# EAGLE board VF_24Euro_PANEL (EAGLE 9.6.2)
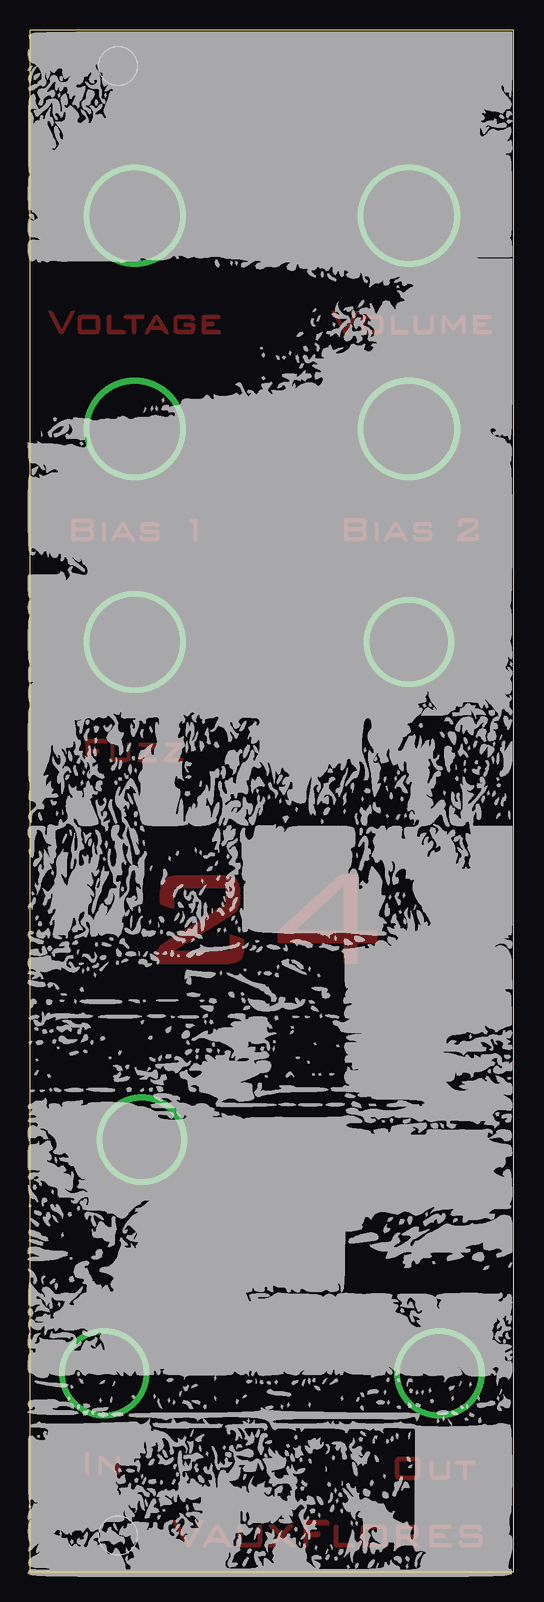
[diagram p0: board, top side]

Size 40.3 x 128.5 mm. Coordinates in mm from the lower left corner, seen from the top.
Copper layers (1*16): Top 0.035mm / dielectric 1.5mm / Bottom 0.035mm
Design rules "default": minimum track width 6mil, minimum drill 0.35mm, track to track 6mil, track to pad 6mil, pad to pad 6mil, via to via 6mil, smd to smd 6mil, copper to edge 40mil, drill to drill 6mil, minimum pad ring 10mil, minimum via ring 8mil, stop-mask expansion 4mil, vias tented up to drill 0mil, thermal gap 10mil
Net classes: 1 power: width 0.61 mm

## Footprints (pad centres in the part's own frame; a part is rotated, then mirrored left to right if it is on the bottom)
EURO_PANEL_8HP = hole 3.2: 7.5,3; 7.5,125.5

## Placement (x,y rotation side)
U$3  [EURO_PANEL_8HP]  -0.17,0 0 top

## Library data of the parts
U$3 = eurohelper

## Tracks (layer width: path | path; a pad name or v marks a point on that pad's centre or on a via)
GND
  pour Top (rank 3): 3.71,105.02 3.51,105.02 3.36,104.93 2.73,103.68 2.64,103.51 1.89,104.93 1.74,105.02 1.54,105.02 1.59,104.87 2.46,103.29 2.6,103.2 2.78,103.24
  pour Top (rank 3): 5.8,103.73 5.8,104.33 5.78,104.53 5.65,104.67 5.45,104.69 4.46,104.69 4.26,104.69 4.07,104.63 3.99,104.45 3.99,104.25 3.99,103.65 3.99,103.45 4.06,103.27 4.24,103.21 4.32,103.44 4.27,103.57 4.27,104.36 4.36,104.47 5.36,104.47 5.52,104.44 5.52,103.44 5.52,103.42 4.34,103.42 4.26,103.2 4.45,103.2 5.44,103.2 5.64,103.22 5.78,103.35 5.8,103.55
  pour Top (rank 3): 7.9,103.2 7.9,103.4 7.72,103.42 6.91,103.42 6.74,103.45 6.74,104.67 6.56,104.69 6.46,104.59 6.46,103.38 6.48,103.2
  pour Top (rank 3): 9.51,104.47 9.51,104.67 9.34,104.69 7.94,104.69 7.82,104.62 7.87,104.47 8.47,104.47 8.52,104.33 8.52,103.33 8.59,103.2 8.79,103.2 8.8,103.39 8.8,104.38 8.91,104.47
  pour Top (rank 3): 11.49,103.34 10.77,104.54 10.66,104.69 10.46,104.69 10.35,104.55 9.65,103.35 9.59,103.2 9.79,103.2 9.91,103.33 10.01,103.5 10.18,103.55 10.97,103.55 10.94,103.76 10.35,103.76 10.16,103.77 10.54,104.46 10.64,104.31 10.93,103.79 10.94,103.77 10.99,103.54 11.12,103.45 11.22,103.28 11.37,103.2 11.57,103.2
  pour Top (rank 3): 13.73,103.55 13.73,103.95 13.61,104.03 13.02,104.03 12.84,104.02 12.85,103.83 13.45,103.83 13.45,103.43 13.26,103.42 12.46,103.42 12.26,103.43 12.26,104.42 12.42,104.47 13.41,104.47 13.45,104.31 13.6,104.29 13.73,104.39 13.68,104.58 13.51,104.68 13.32,104.69 12.32,104.69 12.13,104.66 12,104.51 11.98,104.32 11.98,103.52 12.02,103.33 12.17,103.22 12.37,103.2 13.37,103.2 13.56,103.22 13.7,103.35
  pour Top (rank 3): 15.87,103.2 15.87,103.4 15.69,103.42 14.7,103.42 14.64,103.55 14.64,103.75 14.72,103.87 15.32,103.87 15.37,104.01 15.25,104.09 14.65,104.09 14.64,104.27 14.64,104.47 14.83,104.47 15.83,104.47 15.86,104.64 15.72,104.69 14.52,104.69 14.35,104.66 14.35,103.27 14.48,103.2
  pour Top (rank 3): 27.34,105.03 27.14,105.03 27,104.93 26.36,103.68 26.27,103.51 25.52,104.93 25.38,105.03 25.17,105.03 25.22,104.88 26.09,103.29 26.24,103.2 26.41,103.25
  pour Top (rank 3): 29.44,103.74 29.44,104.34 29.41,104.53 29.28,104.67 29.08,104.7 28.09,104.7 27.89,104.7 27.71,104.63 27.63,104.45 27.62,104.25 27.62,103.66 27.63,103.46 27.7,103.28 27.87,103.21 27.96,103.44 27.9,103.57 27.9,104.37 28,104.48 28.99,104.48 29.15,104.44 29.15,103.45 29.15,103.43 27.97,103.43 27.89,103.21 28.08,103.2 29.08,103.2 29.27,103.23 29.41,103.36 29.44,103.56
  pour Top (rank 3): 31.54,103.2 31.54,103.41 31.36,103.43 30.55,103.43 30.37,103.46 30.37,104.68 30.19,104.7 30.09,104.6 30.09,103.38 30.12,103.2
  pour Top (rank 3): 33.64,103.56 33.64,104.56 33.58,104.7 33.38,104.7 33.36,104.52 33.36,103.52 33.25,103.43 32.44,103.43 32.26,103.45 32.26,104.65 32.11,104.7 31.98,104.63 31.98,103.63 31.99,103.43 32.08,103.26 32.27,103.21 32.47,103.2 33.28,103.2 33.47,103.23 33.61,103.36
  pour Top (rank 3): 36.25,103.2 36.25,104.59 36.16,104.7 35.98,104.68 35.41,103.87 35.29,103.76 34.57,104.7 34.37,104.7 34.33,104.54 34.33,103.35 34.39,103.2 34.57,103.23 34.57,104.22 34.56,104.42 34.64,104.25 34.76,104.09 35.25,103.46 35.39,103.52 35.87,104.15 35.97,104.32 36,104.33 35.99,104.13 35.99,103.34 36.06,103.2
  pour Top (rank 3): 38.47,103.2 38.47,103.4 38.29,103.42 37.3,103.42 37.23,103.56 37.23,103.76 37.32,103.87 37.92,103.87 37.97,104.02 37.85,104.09 37.25,104.09 37.23,104.27 37.23,104.47 37.43,104.48 38.42,104.48 38.46,104.64 38.31,104.7 37.12,104.7 36.95,104.67 36.95,103.28 37.08,103.2
  pour Top (rank 3): 5.31,86.34 5.31,86.54 5.26,86.73 5.11,86.84 4.95,86.72 5,86.55 5,86.39 4.95,86.21 4.75,86.18 3.76,86.18 3.75,86.37 3.75,86.57 3.76,86.76 4.75,86.76 4.93,86.73 5.1,86.86 5.09,86.88 4.98,87.11 4.85,87 4.65,87 3.85,87 3.75,87.1 3.75,87.5 3.94,87.5 4.74,87.5 4.93,87.48 4.99,87.3 4.99,87.13 5.1,86.9 5.25,87 5.3,87.19 5.3,87.38 5.27,87.58 5.13,87.71 4.93,87.75 3.54,87.75 3.45,87.64 3.45,86.05 3.52,85.93 4.71,85.93 4.91,85.93 5.11,85.97 5.26,86.09 5.31,86.28
  pour Top (rank 3): 6.3,85.93 6.3,87.31 6.21,87.42 6.02,87.42 6.02,86.04 6.1,85.93
  pour Top (rank 3): 8.66,86.07 7.95,87.27 7.84,87.42 7.64,87.42 7.52,87.28 6.83,86.07 6.77,85.93 6.97,85.93 7.09,86.05 7.19,86.23 7.36,86.28 8.14,86.28 8.11,86.49 7.53,86.49 7.33,86.49 7.72,87.19 7.82,87.04 8.11,86.52 8.12,86.5 8.17,86.27 8.3,86.18 8.4,86.01 8.55,85.93 8.75,85.93
  pour Top (rank 3): 10.79,86.28 10.79,86.48 10.76,86.68 10.61,86.79 10.41,86.81 9.61,86.81 9.47,86.87 9.47,87.07 9.54,87.2 10.33,87.2 10.51,87.18 10.53,87.01 10.73,87.05 10.76,87.21 10.65,87.38 10.46,87.42 9.66,87.42 9.46,87.42 9.28,87.34 9.21,87.16 9.21,86.96 9.23,86.76 9.34,86.61 9.54,86.57 10.54,86.57 10.54,86.17 10.36,86.15 9.56,86.15 9.41,86.2 9.38,86.37 9.19,86.33 9.16,86.16 9.24,85.99 9.43,85.93 9.63,85.93 10.43,85.93 10.63,85.95 10.76,86.08
  pour Top (rank 3): 13.93,85.93 13.93,87.7 13.81,87.74 13.42,87.67 13.26,87.61 13.31,87.46 13.5,87.46 13.65,87.42 13.65,86.04 13.74,85.93
  pour Top (rank 3): 28.05,86.36 28.05,86.56 27.99,86.74 27.85,86.86 27.68,86.73 27.74,86.56 27.74,86.41 27.68,86.22 27.49,86.19 26.49,86.19 26.49,86.38 26.49,86.58 26.49,86.78 27.48,86.78 27.66,86.75 27.83,86.87 27.83,86.89 27.71,87.13 27.58,87.02 27.38,87.01 26.59,87.01 26.49,87.11 26.49,87.51 26.68,87.52 27.47,87.52 27.67,87.49 27.72,87.32 27.72,87.15 27.83,86.91 27.98,87.01 28.04,87.2 28.04,87.4 28,87.59 27.86,87.73 27.67,87.76 26.28,87.76 26.18,87.66 26.18,86.07 26.26,85.94 27.45,85.94 27.65,85.95 27.84,85.99 28,86.11 28.05,86.3
  pour Top (rank 3): 29.03,85.94 29.03,87.32 28.95,87.43 28.75,87.43 28.75,86.05 28.84,85.94
  pour Top (rank 3): 31.4,86.08 30.69,87.28 30.58,87.44 30.38,87.44 30.26,87.3 29.56,86.09 29.5,85.94 29.7,85.94 29.83,86.07 29.92,86.24 30.09,86.29 30.88,86.29 30.85,86.51 30.26,86.51 30.07,86.51 30.46,87.21 30.55,87.06 30.84,86.54 30.85,86.52 30.9,86.28 31.03,86.2 31.13,86.02 31.28,85.94 31.48,85.94
  pour Top (rank 3): 33.52,86.29 33.52,86.49 33.49,86.69 33.34,86.81 33.14,86.83 32.34,86.83 32.2,86.88 32.2,87.08 32.27,87.22 33.07,87.22 33.25,87.2 33.27,87.02 33.46,87.06 33.49,87.23 33.39,87.39 33.2,87.44 32.4,87.44 32.2,87.43 32.02,87.36 31.95,87.17 31.95,86.97 31.96,86.78 32.08,86.63 32.27,86.59 33.27,86.59 33.27,86.19 33.09,86.17 32.29,86.17 32.14,86.21 32.12,86.38 31.92,86.34 31.89,86.18 31.98,86 32.17,85.94 32.36,85.94 33.16,85.94 33.36,85.97 33.5,86.1
  pour Top (rank 3): 37.43,86.3 37.38,86.46 37.19,86.52 37.14,86.39 37.14,86.19 35.95,86.19 36.11,86.3 37.13,86.92 37.28,87.05 37.35,87.23 37.34,87.43 37.31,87.63 37.16,87.74 36.96,87.76 36.17,87.76 35.97,87.76 35.78,87.7 35.69,87.52 35.69,87.33 35.73,87.16 35.92,87.11 35.98,87.23 35.98,87.43 36.09,87.52 36.88,87.52 37.05,87.49 37.05,87.29 36.99,87.12 35.81,86.38 35.65,86.26 35.6,86.07 35.68,85.94 37.07,85.94 37.26,85.97 37.4,86.1
  pour Top (rank 3): 6.39,69.11 6.39,69.31 6.24,69.36 4.85,69.36 4.66,69.36 4.66,67.57 4.83,67.54 4.96,67.61 4.96,68.2 5.09,68.28 5.68,68.28 5.78,68.38 5.71,68.52 5.12,68.52 4.96,68.56 4.96,68.96 5,69.11
  pour Top (rank 3): 8.37,67.89 8.37,68.9 8.31,69.04 8.11,69.04 8.09,68.86 8.09,67.86 7.98,67.77 7.17,67.77 6.99,67.78 6.99,68.99 6.84,69.04 6.71,68.97 6.71,67.96 6.72,67.76 6.81,67.59 7,67.54 7.2,67.54 8.01,67.54 8.21,67.57 8.34,67.7
  pour Top (rank 3): 10.55,67.54 10.55,67.74 10.38,67.77 9.58,67.77 9.43,67.79 10.55,68.92 10.47,69.04 9.08,69.04 9.07,68.85 9.24,68.81 10.04,68.81 10.01,68.72 9.03,67.73 8.97,67.55 9.16,67.54
  pour Top (rank 3): 12.72,67.54 12.72,67.74 12.55,67.77 11.76,67.77 11.6,67.79 12.72,68.92 12.65,69.04 11.26,69.04 11.25,68.85 11.42,68.81 12.21,68.81 12.18,68.72 11.2,67.73 11.15,67.55 11.33,67.54
  pour Top (rank 3): 4.92,8.12 4.92,9.94 4.71,9.94 4.61,9.84 4.61,8.22 4.71,8.12
  pour Top (rank 3): 7.46,8.12 7.46,9.53 7.36,9.62 7.2,9.57 7.2,8.77 7.21,8.57 7.19,8.49 7.05,8.64 6.01,9.57 5.83,9.62 5.73,9.51 5.73,8.31 5.75,8.12 5.95,8.12 6,8.28 5.99,9.08 5.98,9.28 6.22,9.06 7.26,8.13
  pour Top (rank 3): 32.53,8.26 32.53,9.05 32.52,9.25 32.43,9.43 32.25,9.51 32.06,9.52 30.86,9.52 30.66,9.5 30.49,9.41 30.43,9.22 30.42,9.02 30.42,8.22 30.42,8.03 30.47,7.83 30.63,7.72 30.83,7.7 32.02,7.7 32.21,7.7 32.22,7.95 30.83,7.95 30.72,8.04 30.72,9.24 30.89,9.27 32.08,9.27 32.23,9.22 32.23,8.02 32.23,7.96 32.23,7.71 32.41,7.76 32.51,7.93 32.53,8.13
  pour Top (rank 3): 34.99,8.05 34.99,9.05 34.93,9.19 34.73,9.19 34.7,9.02 34.7,8.02 34.59,7.92 33.79,7.92 33.61,7.94 33.61,9.14 33.46,9.19 33.33,9.12 33.33,8.12 33.33,7.92 33.43,7.75 33.62,7.7 33.82,7.7 34.62,7.7 34.82,7.72 34.96,7.85
  pour Top (rank 3): 37.11,8.97 37.11,9.17 36.93,9.19 35.53,9.19 35.41,9.12 35.46,8.97 36.06,8.97 36.12,8.83 36.12,7.83 36.19,7.7 36.39,7.7 36.4,7.88 36.4,8.88 36.51,8.97
  pour Top (rank 3): 14.5,4.24 14.3,4.24 14.12,4.21 13.22,2.44 13.13,2.58 12.3,4.16 12.15,4.24 11.95,4.24 11.91,4.15 13.05,2.06 13.24,2.06 13.39,2.14
  pour Top (rank 3): 16.72,2.16 15.79,3.72 15.67,3.85 15.47,3.85 15.33,3.73 14.43,2.16 14.45,2.06 14.65,2.06 14.77,2.19 14.87,2.36 15.01,2.48 16,2.48 16.02,2.74 15.22,2.74 15.1,2.79 15.5,3.49 15.59,3.52 15.99,2.81 16.02,2.75 16.03,2.48 16.19,2.44 16.39,2.09 16.57,2.06 16.78,2.06
  pour Top (rank 3): 19.31,2.48 19.31,3.68 19.29,3.85 19.09,3.85 18.96,3.78 18.96,2.38 18.82,2.33 17.82,2.33 17.65,2.36 17.65,3.75 17.56,3.85 17.36,3.85 17.31,3.7 17.31,2.51 17.33,2.31 17.42,2.14 17.6,2.07 17.8,2.06 18.79,2.06 18.99,2.07 19.18,2.12 19.29,2.29
  pour Top (rank 3): 22.15,2.06 21.14,3.02 21.28,3.16 21.83,3.72 21.95,3.85 21.56,3.85 21.42,3.71 21.02,3.27 20.88,3.27 20.32,3.84 20.13,3.85 19.93,3.85 19.93,3.78 20.65,3.09 20.74,2.95 19.9,2.1 20,2.06 20.2,2.06 20.36,2.13 20.89,2.72 21.03,2.71 21.59,2.14 21.75,2.06
  pour Top (rank 3): 24.88,3.95 24.88,4.15 24.77,4.24 22.96,4.24 22.8,4.2 22.8,2.18 22.88,2.06 23.08,2.06 23.16,2.18 23.16,2.78 23.2,2.94 24.01,2.94 24.14,3.01 24.14,3.21 23.96,3.23 23.35,3.23 23.16,3.24 23.16,3.85 23.27,3.95
  pour Top (rank 3): 27.08,2.06 27.08,2.26 26.95,2.33 25.74,2.33 25.68,2.48 25.68,3.69 25.65,3.85 25.44,3.85 25.34,3.75 25.34,2.14 25.46,2.06
  pour Top (rank 3): 29.74,2.61 29.74,3.42 29.72,3.62 29.62,3.79 29.44,3.84 29.38,3.58 29.4,3.41 29.4,2.4 29.4,2.33 27.99,2.33 27.9,2.44 27.9,3.45 27.97,3.59 29.37,3.59 29.42,3.85 29.23,3.85 28.02,3.85 27.82,3.84 27.65,3.75 27.57,3.56 27.57,3.36 27.57,2.56 27.57,2.36 27.64,2.17 27.81,2.08 28.01,2.06 29.22,2.06 29.42,2.06 29.61,2.12 29.72,2.28 29.74,2.48
  pour Top (rank 3): 32.47,2.11 31.87,2.65 31.77,2.75 31.72,3.01 30.94,3.01 30.87,3.14 30.87,3.55 31.02,3.59 31.82,3.59 31.99,3.51 32.02,3.31 32.02,3.19 31.94,3.03 31.75,3.01 31.77,2.76 31.96,2.77 32.16,2.79 32.31,2.91 32.35,3.11 32.35,3.51 32.31,3.7 32.16,3.83 31.96,3.85 30.56,3.85 30.53,3.68 30.53,2.08 30.71,2.06 30.87,2.1 30.87,2.7 31.01,2.76 31.21,2.76 31.4,2.72 31.97,2.16 32.13,2.06 32.53,2.06
  pour Top (rank 3): 35.15,2.06 35.15,2.26 35.01,2.32 33.82,2.32 33.66,2.37 33.66,2.76 33.77,2.86 34.36,2.86 34.55,2.87 34.55,3.07 34.4,3.13 33.8,3.13 33.66,3.18 33.66,3.58 33.86,3.59 35.05,3.59 35.13,3.71 35.08,3.85 33.49,3.85 33.32,3.82 33.32,2.23 33.36,2.06
  pour Top (rank 3): 37.7,2.48 37.7,2.68 37.68,2.88 37.58,3.05 37.39,3.11 37.19,3.12 36.18,3.12 36.11,3.25 36.11,3.45 36.17,3.59 37.18,3.59 37.37,3.57 37.37,3.37 37.54,3.39 37.67,3.48 37.63,3.68 37.5,3.82 37.3,3.85 37.1,3.85 36.29,3.85 36.09,3.84 35.9,3.78 35.81,3.6 35.8,3.4 35.81,3.2 35.84,3 35.98,2.87 36.18,2.84 36.38,2.83 37.39,2.83 37.39,2.64 37.39,2.43 37.29,2.33 36.09,2.33 36.04,2.48 35.95,2.58 35.76,2.54 35.74,2.36 35.8,2.17 35.97,2.08 36.17,2.06 37.18,2.06 37.38,2.06 37.57,2.12 37.68,2.28
  pour Top (rank 3): 17.83,52.12 17.83,52.52 17.81,52.71 16.67,53.08 16.67,51.88 16.66,51.7 12.06,51.7 11.9,51.71 16.65,54.65 16.82,54.77 16.98,54.89 17.13,55.02 17.26,55.17 17.37,55.34 17.44,55.52 17.48,55.72 17.5,55.92 17.5,56.12 17.5,56.32 17.49,56.52 17.48,56.71 17.46,56.91 17.44,57.11 17.4,57.31 17.33,57.49 17.21,57.65 17.05,57.77 16.87,57.85 16.68,57.91 16.48,57.94 16.28,57.96 16.08,57.98 15.88,57.98 12.49,57.98 12.29,57.98 12.09,57.97 11.89,57.95 11.69,57.91 11.5,57.86 11.32,57.78 11.16,57.66 11.04,57.5 10.96,57.32 10.91,57.13 10.88,56.93 10.86,56.73 10.86,56.53 10.86,55.73 10.93,55.59 11.89,55.33 12.01,55.37 12.01,56.97 12.17,57 16.17,57 16.3,56.94 16.3,55.74 16.27,55.56 11.37,52.48 11.2,52.37 11.04,52.26 10.89,52.13 10.75,51.98 10.65,51.81 10.58,51.63 10.54,51.43 10.52,51.23 10.52,50.83 10.58,50.7 16.17,50.7 16.37,50.7 16.57,50.71 16.77,50.73 16.96,50.76 17.15,50.81 17.34,50.89 17.5,51 17.63,51.16 17.71,51.34 17.77,51.53 17.8,51.72 17.82,51.92
  pour Top (rank 3): 28.93,52.63 28.93,53.23 28.84,53.34 27.44,53.34 27.27,53.37 27.27,57.97 27.16,58.06 25.96,58.06 25.8,57.98 26.15,57.13 26.15,53.34 26.15,53.34 21.95,53.34 22.04,53.45 26.04,57.09 26.14,57.13 25.78,57.97 20.74,53.43 20.64,53.27 20.64,52.47 20.8,52.43 26,52.43 26.15,52.38 26.15,50.78 26.27,50.7 27.27,50.7 27.27,52.3 27.33,52.43 28.93,52.43
N$17  (via drill 7.5)
  other vias: 8.72,113.03
N$18  (via drill 7.5)
  other vias: 31.58,113.03
N$19  (via drill 7.5)
  other vias: 31.58,95.25
N$20  (via drill 7.5)
  other vias: 8.72,95.25
N$21  (via drill 7.5)
  other vias: 8.72,77.47
N$22  (via drill 6.5)
  other vias: 6.18,16.51
N$23  (via drill 6.5)
  other vias: 34.12,16.51
N$24  (via drill 6.5)
  other vias: 31.58,77.47
N$25  (via drill 6.5)
  other vias: 9.33,36